# EAGLE board 8_RGB_SMD_LEDs (EAGLE 6.4)
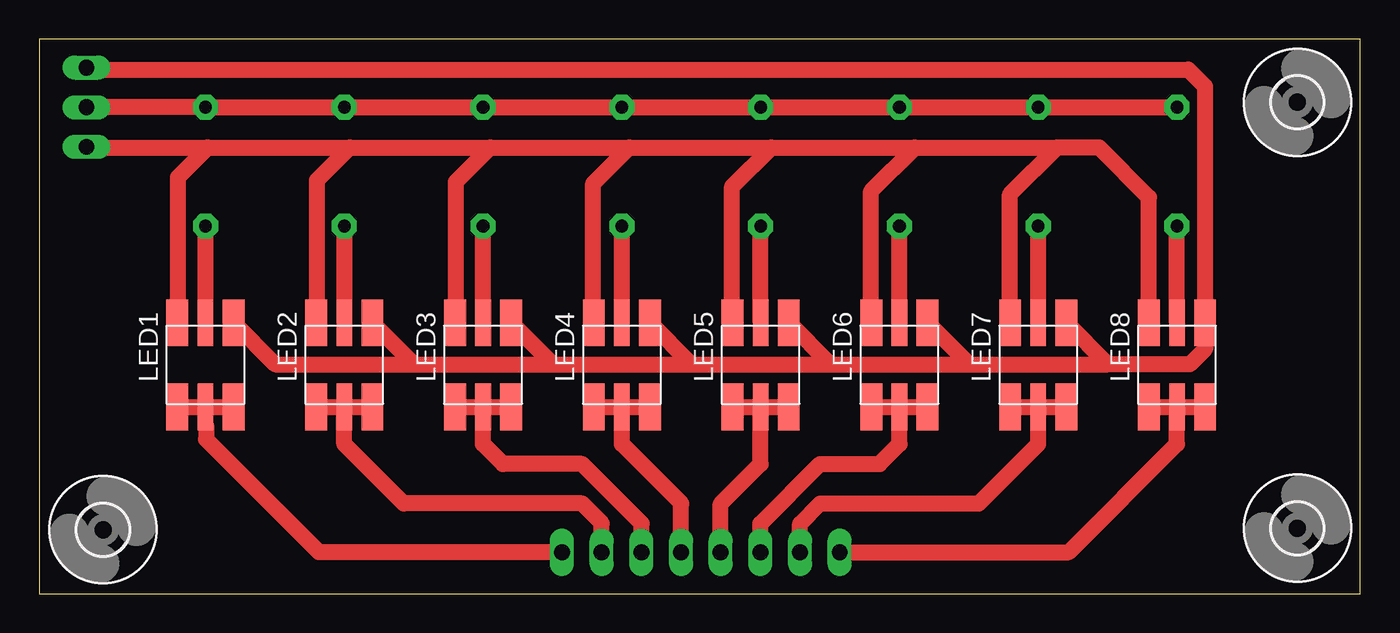
[diagram p0: board, top side]
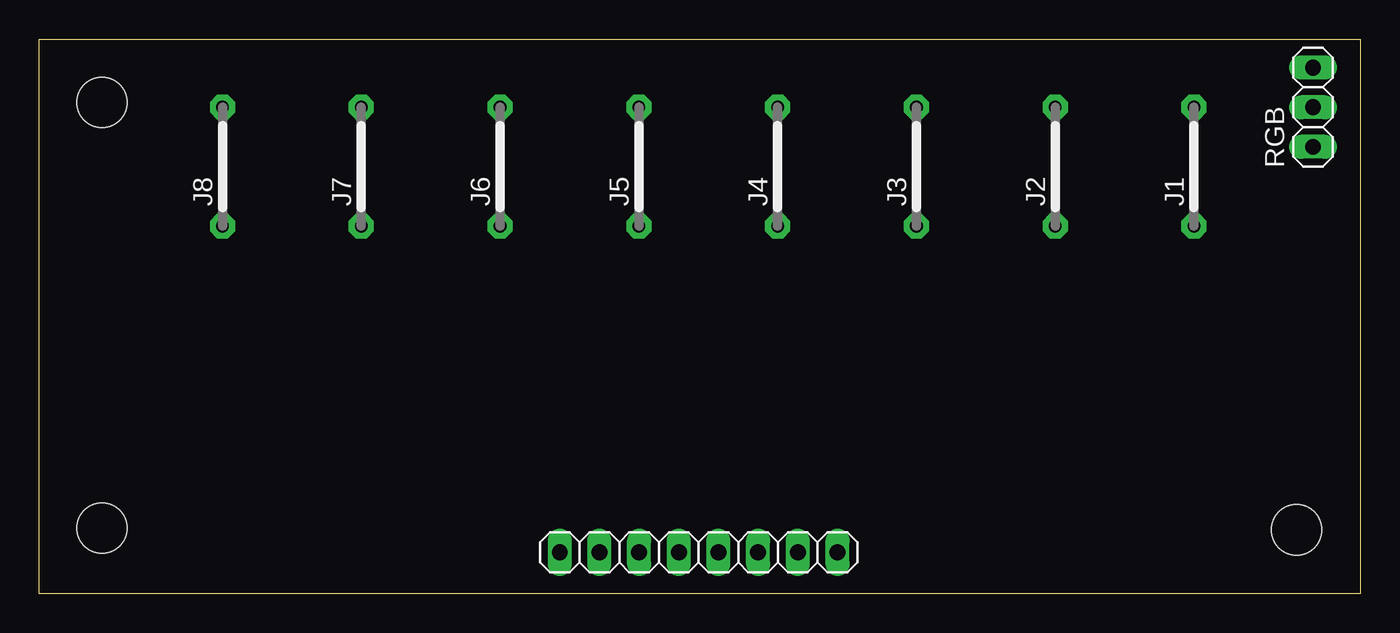
[diagram p1: board, bottom side, seen from below]

Size 84.64 x 35.55 mm. Coordinates in mm from the lower left corner, seen from the top.
Outline: 0,0 84.64,0 84.64,35.55 0,35.55 0,0
Copper layers (1*16): Top 0.035mm / dielectric 1.5mm / Bottom 0.035mm
Design rules "default": minimum track width 10mil, minimum drill 24mil, track to track 8mil, track to pad 8mil, pad to pad 8mil, via to via 8mil, smd to smd 8mil, copper to edge 40mil, drill to drill 8mil, minimum pad ring 10mil, minimum via ring 8mil, stop-mask expansion 4mil, vias tented up to drill 0mil, thermal gap 10mil

## Footprints (pad centres in the part's own frame; a part is rotated, then mirrored left to right if it is on the bottom)
07 = drill 0.813 pad 1.6 octagon: 1 -3.81,0; 2 3.81,0
1X08 = drill 1.016 long: 1 -8.89,0; 2 -6.35,0; 3 -3.81,0; 4 -1.27,0; 5 1.27,0; 6 3.81,0; 7 6.35,0; 8 8.89,0
5050LED = smd 3 x 1.4: B1 -2.7,-1.8; B2 2.7,-1.8; R1 -2.7,1.8; R2 2.7,1.8 | smd 3 x 1: G1 -2.7,0; G2 2.7,0
1X03 = drill 1.016 long: 1 -2.54,0; 2 0,0; 3 2.54,0
3,2 = hole 3.2: 0,0

## Placement (x,y rotation side)
J1  J7MM  [07]  10.66,27.37 90 bottom
J2  J7MM  [07]  19.55,27.37 90 bottom
J3  J7MM  [07]  28.44,27.37 90 bottom
J4  J7MM  [07]  37.33,27.37 90 bottom
J5  J7MM  [07]  46.22,27.37 90 bottom
J6  J7MM  [07]  55.11,27.37 90 bottom
J7  J7MM  [07]  64,27.37 90 bottom
J8  J7MM  [07]  72.89,27.37 90 bottom
JP1  [1X08]  42.39,2.66 0 bottom
LED1  F503605050  [5050LED]  10.66,14.67 270 top
LED2  F503605050  [5050LED]  19.55,14.67 270 top
LED3  F503605050  [5050LED]  28.44,14.67 270 top
LED4  F503605050  [5050LED]  37.33,14.67 270 top
LED5  F503605050  [5050LED]  46.22,14.67 270 top
LED6  F503605050  [5050LED]  55.11,14.67 270 top
LED7  F503605050  [5050LED]  64,14.67 270 top
LED8  F503605050  [5050LED]  72.89,14.67 270 top
RGB  [1X03]  3.04,31.18 90 bottom
U$1  [3,2]  4.1,4.1 0 top
U$2  [3,2]  80.6,4.2 0 top
U$3  [3,2]  80.6,31.5 0 top
U$5  LOGO-COPPER7  [COPPER7]  81.1,9.5 90 top

## Library data of the parts
J1-J8 = jumper
JP1 RGB = pinhead
LED1-LED8 = BEEP
U$1-U$3 = holes
U$5 = Branding

## Nets
N$2: J1.2 J2.2 J3.2 J4.2 J5.2 J6.2 J7.2 J8.2 RGB.2
N$5: J1.1 LED1.G1
N$7: JP1.8 LED1.B2 LED1.G2 LED1.R2
N$8: JP1.7 LED2.B2 LED2.G2 LED2.R2
N$9: JP1.6 LED3.B2 LED3.G2 LED3.R2
N$10: JP1.5 LED4.B2 LED4.G2 LED4.R2
N$12: J2.1 LED2.G1
N$14: JP1.4 LED5.B2 LED5.G2 LED5.R2
N$15: JP1.3 LED6.B2 LED6.G2 LED6.R2
N$16: JP1.2 LED7.B2 LED7.G2 LED7.R2
N$17: JP1.1 LED8.B2 LED8.G2 LED8.R2
N$19: J3.1 LED3.G1
N$22: J4.1 LED4.G1
N$25: J5.1 LED5.G1
N$28: J6.1 LED6.G1
N$31: J7.1 LED7.G1
N$33: LED1.R1 LED2.R1 LED3.R1 LED4.R1 LED5.R1 LED6.R1 LED7.R1 LED8.R1 RGB.3
N$34: J8.1 LED8.G1
N$35: LED1.B1 LED2.B1 LED3.B1 LED4.B1 LED5.B1 LED6.B1 LED7.B1 LED8.B1 RGB.1

## Tracks (layer width: path | path; a pad name or v marks a point on that pad's centre or on a via)
N$2
  Top 1.016: J8.2 J7.2 J6.2 J5.2 J4.2 J3.2 J2.2 J1.2 RGB.2
N$5
  Top 1.016: LED1.G1 J1.1
N$7
  Top 1.016: LED1.B2 LED1.G2 | LED1.G2 LED1.R2 | LED1.G2 10.66,10.86 10.7,10.82 10.7,9.9 17.94,2.66 JP1.8
N$8
  Top 1.016: LED2.B2 LED2.G2 | LED2.G2 LED2.R2 | LED2.G2 19.55,9.59 23.36,5.78 34.79,5.78 36.06,4.51 36.04,4.49 JP1.7
N$9
  Top 1.016: LED3.B2 LED3.G2 | LED3.G2 LED3.R2 | LED3.G2 28.44,9.59 29.71,8.32 34.79,8.32 38.6,4.51 38.58,4.49 JP1.6
N$10
  Top 1.016: LED4.B2 LED4.G2 | LED4.G2 LED4.R2 | LED4.G2 37.33,9.59 41.14,5.78 41.12,5.76 JP1.5
N$12
  Top 1.016: J2.1 LED2.G1
N$14
  Top 1.016: LED5.B2 LED5.G2 | LED5.G2 LED5.R2 | LED5.G2 46.22,8.32 43.66,5.76 JP1.4
N$15
  Top 1.016: LED6.B2 LED6.G2 | LED6.G2 LED6.R2 | LED6.G2 55.11,9.59 53.84,8.32 50.03,8.32 46.2,4.49 JP1.3
N$16
  Top 1.016: LED7.B2 LED7.G2 | LED7.G2 LED7.R2 | LED7.G2 64,9.59 60.19,5.78 50.03,5.78 48.74,4.49 JP1.2
N$17
  Top 1.016: LED8.B2 LED8.G2 | LED8.G2 LED8.R2 | LED8.G2 72.89,9.59 65.96,2.66 JP1.1
N$19
  Top 1.016: LED3.G1 J3.1
N$22
  Top 1.016: LED4.G1 J4.1
N$25
  Top 1.016: LED5.G1 J5.1
N$28
  Top 1.016: LED6.G1 J6.1
N$31
  Top 1.016: LED7.G1 J7.1
N$33
  Top 1.016: LED2.R1 24.02,14.7 | LED1.R1 15.13,14.7 24.02,14.7 | RGB.3 3.16,33.6 73.6,33.6 74.69,32.51 LED8.R1 74.7,15.7 73.7,14.7 68.47,14.7 | 24.02,14.7 32.91,14.7 | 32.91,14.7 41.8,14.7 | 41.8,14.7 50.69,14.7 | 50.69,14.7 59.58,14.7 | 59.58,14.7 68.47,14.7 | LED3.R1 32.91,14.7 | LED4.R1 41.8,14.7 | LED5.R1 50.69,14.7 | LED6.R1 59.58,14.7 | LED7.R1 68.47,14.7
N$34
  Top 1.016: LED8.G1 J8.1
N$35
  Top 1.016: RGB.1 3.08,28.6 10.8,28.6 | 10.8,28.6 19.9,28.6 | 19.9,28.6 28.9,28.6 | 28.9,28.6 37.8,28.6 | 37.8,28.6 46.9,28.6 | 46.9,28.6 56.1,28.6 | 56.1,28.6 65.2,28.6 | LED1.B1 8.9,17.41 8.9,26.7 10.8,28.6 | LED2.B1 17.8,17.42 17.8,26.5 19.9,28.6 | LED3.B1 26.7,17.43 26.7,26.4 28.9,28.6 | LED4.B1 35.5,17.4 35.5,26.3 37.8,28.6 | LED5.B1 44.4,17.39 44.4,26.1 46.9,28.6 | LED6.B1 53.3,25.8 56.1,28.6 | LED7.B1 62.2,25.6 65.2,28.6 | LED8.B1 71.1,25.4 67.9,28.6 65.2,28.6

## Text on the board
tCName: RGB SMD 0.1.1